# Altium PCB RedHatErrector PCB v1.0.0.0.PcbDoc
Units mil, origin at the board's own origin, x right, y up, seen from the top; angles counter-clockwise.
Board outline 6000 x 4000 mil, 2 copper layers (Top Layer, Bottom Layer); 40 components, 52 nets, 232 pads, 0 vias.
Unrouted connection lines stored in the file: 151.
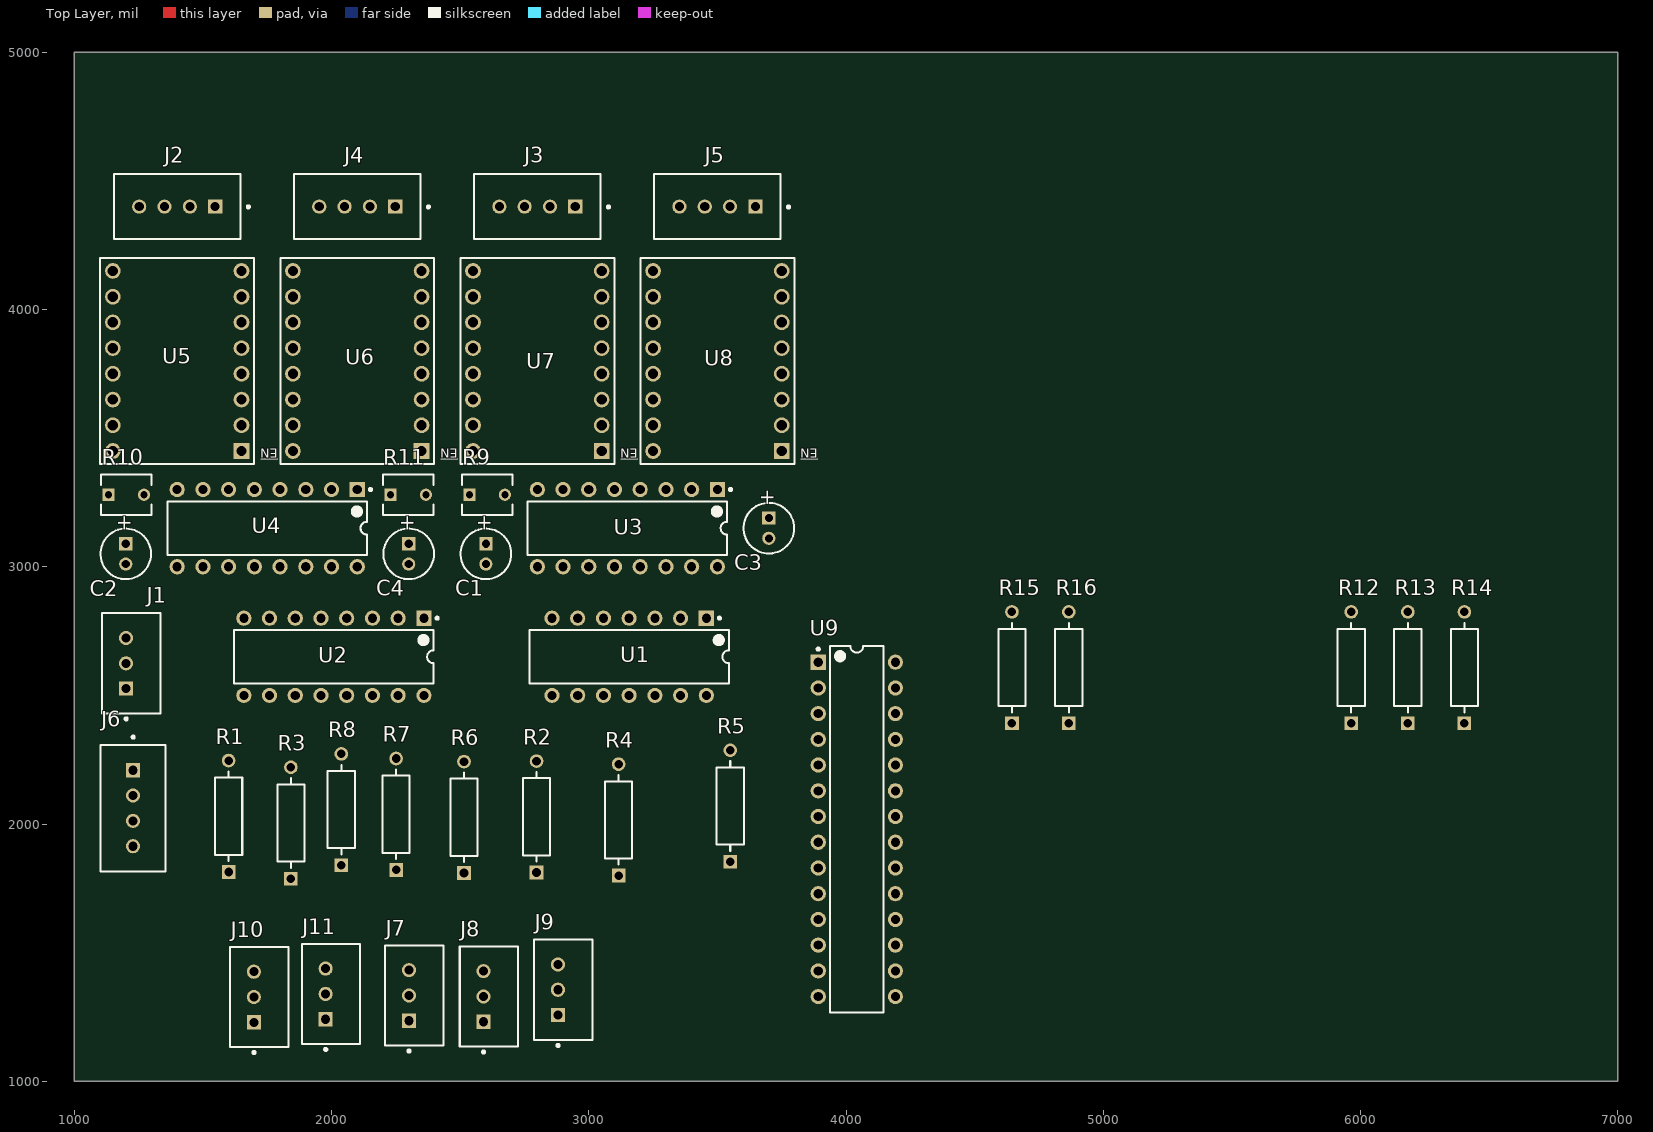
[diagram p0: Top Layer view]
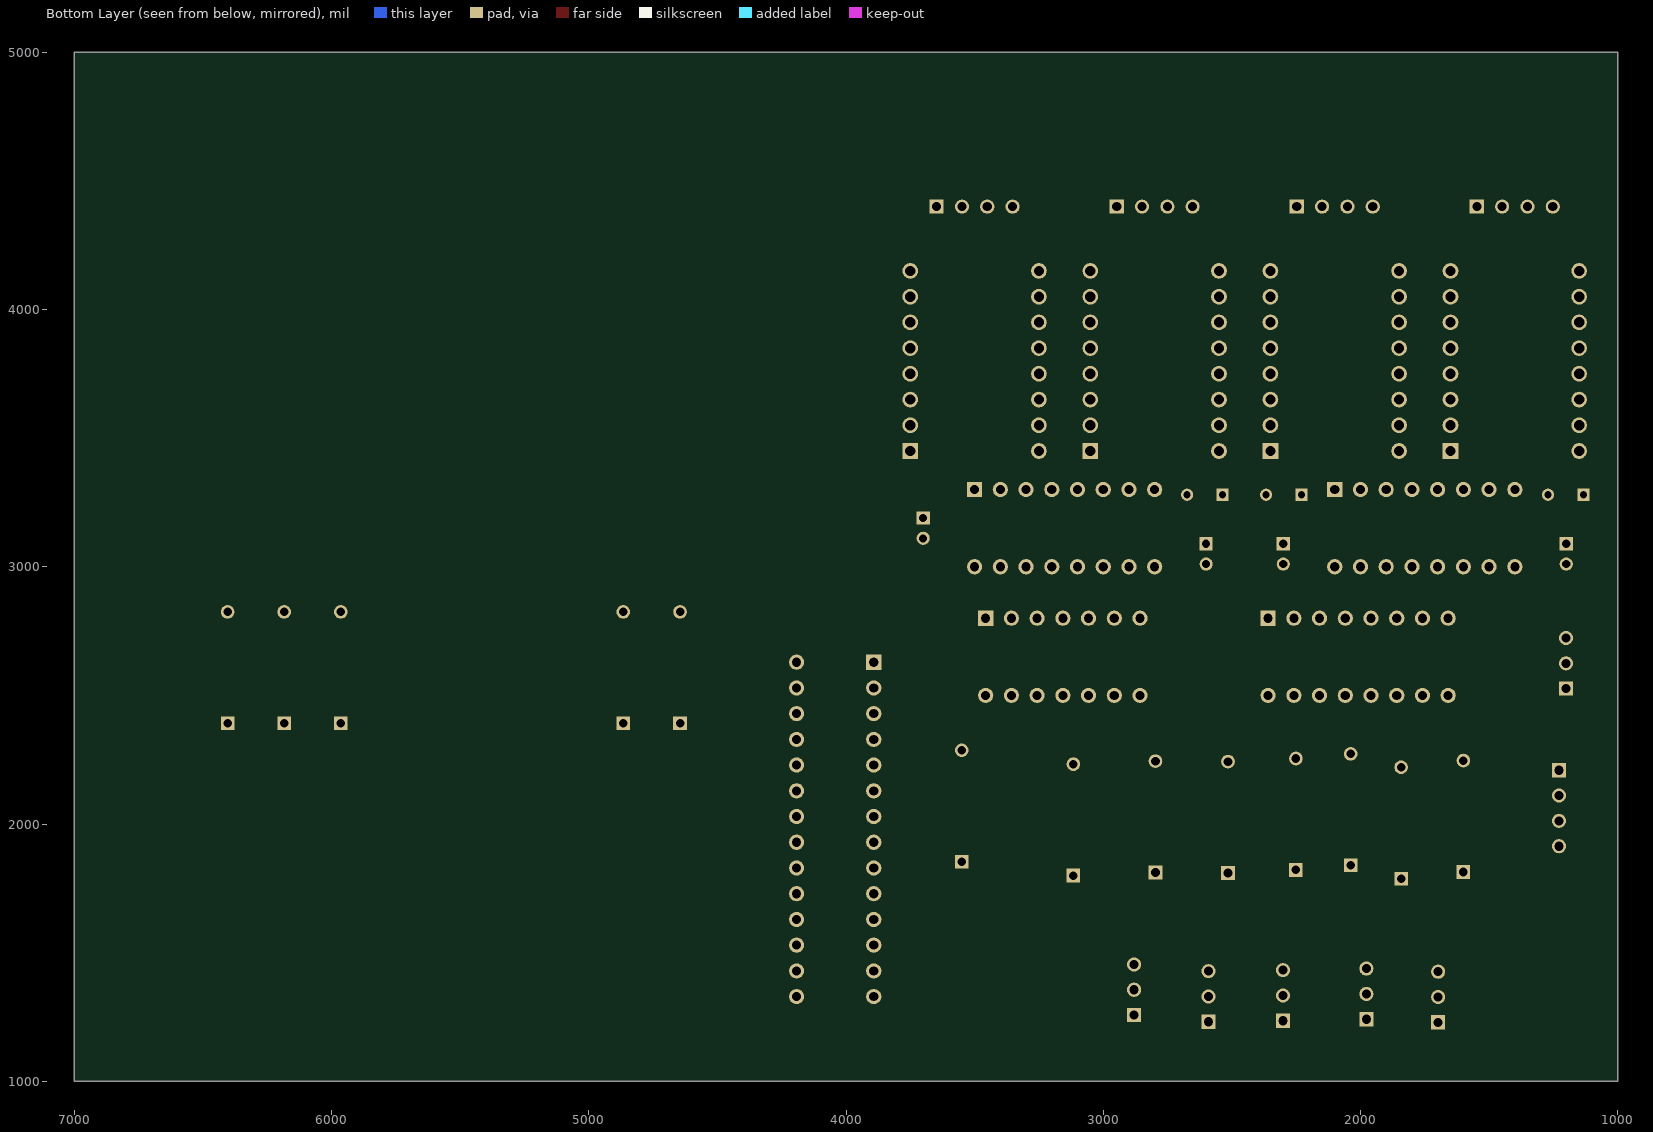
[diagram p1: Bottom Layer view, seen from below]

## Layer stack, top to bottom
Top Solder: solder mask 0.4, Solder Resist, Dk 3.5
Top Layer: signal copper 1.4
Dielectric 1: dielectric 12.6, FR-4, Dk 4.8
Bottom Layer: signal copper 1.4
Bottom Solder: solder mask 0.4, Solder Resist, Dk 3.5

## Board outline
1000,1000 7000,1000 7000,5000 1000,5000

## Design rules (kind name [scope] priority, off if disabled: settings)
Clearance [All] p1: gap=10 ignorepadtopadclearanceinfootprint=FALSE except(0: Arc-Hole Track-Hole SMDPad-Hole THPad-Hole Via-Hole Fill-Hole Poly-Hole Region-Hole Text-Hole)
PolygonConnect [All] p1: connectstyle=Relief reliefconductorwidth=10 reliefentries=4 polygonreliefangle="90 Angle" airgapwidth=10
RoutingVias [All] p1: holewidth=28 width=50 viastyle="Through Hole" minholewidth=28 minwidth=50 maxholewidth=28 maxwidth=50
SolderMaskExpansion [All] p1: expansion=4 istentingtop=FALSE
Width [All] p1: maxlimit=10 minlimit=10 preferedwidth=10
30 further rules are at their usual default settings.

## Components (designator, comment, footprint, x,y, rotation, side; value= is the part's Value field where it differs from the comment)
C1 "ECA1HM220" CAPPR55-200-1100X500X1200 2600,3050 r270 top value=22µF
C2 "ECA1HM220" CAPPR55-200-1100X500X1200 1200,3050 r270 top value=22µF
C3 "ECA1HM220" CAPPR55-200-1100X500X1200 3700,3150 r270 top value=22µF
C4 "ECA1HM220" CAPPR55-200-1100X500X1200 2300,3050 r270 top value=22µF
J1 "JST3 HR Acct" FP-B3B-XH-A_LF_SN-MFG 1221.67,2624.57 r90 top
J2 "B04B-XASK-1(LF)(SN)" FP-B04B-XASK-1_LF_SN-MFG 1400,4400 r0 top
J3 "B04B-XASK-1(LF)(SN)" FP-B04B-XASK-1_LF_SN-MFG 2800,4400 r0 top
J4 "B04B-XASK-1(LF)(SN)" FP-B04B-XASK-1_LF_SN-MFG 2100,4400 r0 top
J5 "B04B-XASK-1(LF)(SN)" FP-B04B-XASK-1_LF_SN-MFG 3500,4400 r0 top
J6 "B04B-XASK-1(LF)(SN)" FP-B04B-XASK-1_LF_SN-MFG 1228,2061.36 r90 top
J7 "JST3 HR Acct" FP-B3B-XH-A_LF_SN-MFG 2321.67,1333.57 r90 top
J8 "JST3 HR Acct" FP-B3B-XH-A_LF_SN-MFG 2611.67,1329.57 r90 top
J9 "JST3 HR Acct" FP-B3B-XH-A_LF_SN-MFG 2900.67,1355.57 r90 top
J10 "JST3 HR Acct" FP-B3B-XH-A_LF_SN-MFG 1718.67,1327.43 r90 top
J11 "JST3 HR Acct" FP-B3B-XH-A_LF_SN-MFG 1997.67,1339.43 r90 top
R1 "10K" FP-RNC55-MFG 1600,2030 r90 top value=10kΩ
R2 "10K" FP-RNC55-MFG 2797,2028 r90 top value=10kΩ
R3 "10K" FP-RNC55-MFG 1842,2004 r90 top value=10kΩ
R4 "10K" FP-RNC55-MFG 3116,2016 r90 top value=10kΩ
R5 "10K" FP-RNC55-MFG 3550,2070 r90 top value=10kΩ
R6 "10K" FP-RNC55-MFG 2515,2026 r90 top value=10kΩ
R7 "10K" FP-RNC55-MFG 2251,2038 r90 top value=10kΩ
R8 "10K" FP-RNC55-MFG 2038,2056 r90 top value=10kΩ
R9 "103" FP-PTFL04_2N34-MFG 2605,3280 r0 top
R10 "103" FP-PTFL04_2N34-MFG 1202,3280 r0 top
R11 "103" FP-PTFL04_2N34-MFG 2298,3280 r0 top
R12 "2.2K" FP-RNC55-MFG 5964,2608 r90 top value=10kΩ
R13 "2.2K" FP-RNC55-MFG 6184,2608 r90 top value=10kΩ
R14 "2.2K" FP-RNC55-MFG 6404,2608 r90 top value=10kΩ
R15 "2.2K" FP-RNC55-MFG 4645,2608 r90 top value=10kΩ
R16 "2.2K" FP-RNC55-MFG 4866,2608 r90 top value=10kΩ
U1 "SN74LS90N" N0014A 3157,2650 r270 top
U2 "CD4051BE" N0016A 2009,2650 r270 top
U3 "SN74LS595N" N0016A 3150,3150 r270 top
U4 "SN74LS595N" N0016A 1750,3150 r270 top
U5 "A4988 Motor Driver" "Polo-A4988 Motor Driver_V" 1400,3800 r180 top
U6 "A4988 Motor Driver" "Polo-A4988 Motor Driver_V" 2100,3800 r180 top
U7 "A4988 Motor Driver" "Polo-A4988 Motor Driver_V" 2800,3800 r180 top
U8 "A4988 Motor Driver" "Polo-A4988 Motor Driver_V" 3500,3800 r180 top
U9 "TLC5940NT" NT0028A 4042,1979 r0 top

## Footprints (in the part's own frame and the unit in brackets; to place one, negate y for a bottom-side part, rotate by r counter-clockwise, add the part's x,y. Pads: shape width x height; smd on the part's side, far side on the other; paste and mask are expansions set on the pad)
CAPPR55-200-1100X500X1200 [mm] "THD, 2-Leads, Dia 5mm, Pin Spacing 2mm"
  rect 1.3x1.3 hole 0.8: 1(-1,0)
  round 1.3 hole 0.8: 2(1,0)
  silkscreen extent -2.5,-2.5 2.5,2.5, body extent -2.5,-2.5 2.45,2.5, height 12
FP-B3B-XH-A_LF_SN-MFG [mm]
  rect 1.4x1.4 hole 0.9 paste-1000 mask+0: 1(-2.5,0.525)
  round 1.4 hole 0.9 paste-1000 mask+0: 2(0,0.525) 3(2.5,0.525)
  silkscreen extent -5.61,-2.88 4.95,2.88, body extent -5.05,-2.98 5.05,2.98, height 0.25
FP-B04B-XASK-1_LF_SN-MFG [mm]
  rect 1.4x1.4 hole 0.9 paste-1000 mask+0: 1(3.75,0)
  round 1.4 hole 0.9 paste-1000 mask+0: 2(1.25,0) 3(-1.25,0) 4(-3.75,0)
  silkscreen extent -6.25,-3.2 7.15,3.2, body extent -6.35,-3.3 6.35,3.3, height 0.25
FP-PTFL04_2N34-MFG [mm]
  rect 1.2x1.2 hole 0.7 paste-1000 mask+0: 1(-1.75,0)
  round 1.2 hole 0.7 paste-1000 mask+0: 2(1.75,0)
  silkscreen extent -2.5,-2 2.5,2, body extent -2.6,-2.1 2.6,2.1, height 0.25
FP-RNC55-MFG [mm]
  rect 1.35x1.35 hole 0.85 paste-1000 mask+0: 1(-5.5,0)
  round 1.35 hole 0.85 paste-1000 mask+0: 2(5.5,0)
  silkscreen extent -4.43,-1.35 4.43,1.35, body extent -6.27,-1.45 6.27,1.45, height 0.25
N0014A [mm] "DIP, 14-Leads, Body 19.7x6.6mm, Pitch 2.54mm"
  rect 1.5x1.5 hole 0.9: 1(-3.81,7.62)
  round 1.5 hole 0.9: 2(-3.81,5.08) 3(-3.81,2.54) 4(-3.81,0) 5(-3.81,-2.54) 6(-3.81,-5.08) 7(-3.81,-7.62) 8(3.81,-7.62) 9(3.81,-5.08) 10(3.81,-2.54) 11(3.81,0) 12(3.81,2.54) 13(3.81,5.08) 14(3.81,7.62)
  silkscreen extent -3.93,-9.85 2.65,9.85, body extent -3.95,-9.85 3.95,9.85, height 5.08
N0016A [mm] "DIP, 16-Leads, Body 19.7x6.6mm, Pitch 2.54mm"
  rect 1.5x1.5 hole 0.9: 1(-3.81,8.89)
  round 1.5 hole 0.9: 2(-3.81,6.35) 3(-3.81,3.81) 4(-3.81,1.27) 5(-3.81,-1.27) 6(-3.81,-3.81) 7(-3.81,-6.35) 8(-3.81,-8.89) 9(3.81,-8.89) 10(3.81,-6.35) 11(3.81,-3.81) 12(3.81,-1.27) 13(3.81,1.27) 14(3.81,3.81) 15(3.81,6.35) 16(3.81,8.89)
  silkscreen extent -3.93,-9.85 2.65,10.32, body extent -3.95,-9.85 3.95,9.85, height 5.08
NT0028A [mm] "DIP, 28-Leads, Body 35.69x6.73mm, Pitch 2.54mm, Row Spacing 7.62mm"
  rect 1.5x1.5 hole 0.9: 1(-3.81,16.51)
  round 1.5 hole 0.9: 2(-3.81,13.97) 3(-3.81,11.43) 4(-3.81,8.89) 5(-3.81,6.35) 6(-3.81,3.81) 7(-3.81,1.27) 8(-3.81,-1.27) 9(-3.81,-3.81) 10(-3.81,-6.35) 11(-3.81,-8.89) 12(-3.81,-11.43) 13(-3.81,-13.97) 14(-3.81,-16.51) 15(3.81,-16.51) 16(3.81,-13.97) 17(3.81,-11.43) 18(3.81,-8.89) 19(3.81,-6.35) 20(3.81,-3.81) 21(3.81,-1.27) 22(3.81,1.27) 23(3.81,3.81) 24(3.81,6.35) 25(3.81,8.89) 26(3.81,11.43) 27(3.81,13.97) 28(3.81,16.51)
  silkscreen extent -3.93,-18.1 2.65,18.1, body extent -3.95,-18.1 3.95,18.1, height 5.08
"Polo-A4988 Motor Driver_V" [mm] "THD, 16-Leads, Body 20.3x15.2mm, Pitch 2.54mm"
  rect 1.55x1.55 hole 1.02: 1(-6.35,8.89)
  round 1.55 hole 1.02: 2(-6.35,6.35) 3(-6.35,3.81) 4(-6.35,1.27) 5(-6.35,-1.27) 6(-6.35,-3.81) 7(-6.35,-6.35) 8(-6.35,-8.89) 9(6.35,-8.89) 10(6.35,-6.35) 11(6.35,-3.81) 12(6.35,-1.27) 13(6.35,1.27) 14(6.35,3.81) 15(6.35,6.35) 16(6.35,8.89)
  silkscreen extent -9.91,-10.15 7.6,10.15, body extent -7.62,-10.16 7.62,10.16, height 5.04

## Part data
C1 C2 C3 C4: library part CMP-001-00027-7, "Aluminum Electrolytic Capacitor, 22 uF, +/- 20%, 50 V, -40 to 85 degC, 2-Pin THD, RoHS, Bulk", Capacitor Type=Electrolytic, Case/Package=Radial, Manufacturer=Panasonic, Max Operating Temperature=85°C, Min Operating Temperature=-40°C, Package Description="2-Pin Radial Lead, Dia 5 mm, Height 12 mm", Package Quantity=200, Package Reference=CAPPR55-200-1100X500X1200, Ripple Current=100mA, Tolerance=20%, Voltage Rating=50V, Datasheet URL=https://industrial.panasonic.com/cdbs/www-data/pdf/RDF0000/ABA0000C1218.pdf, Datasheet Version="Rev. 05, 10/2016", Diameter=5mm, Lead Pitch=2mm, Manufacturer URL=http://www.panasonic.com/, Mounting Technology=TH, Packaging=Bulk, Pins=2, Ripple Current (AC)=100mA, RoHS Compliant=True
J1 J7 J8 J9 J10 J11: library part CMP-17439-000014-2, "CONN HEADER VERT 3POS 2.5MM", Color=Natural, Contact Resistance=20mR, Current Rating=3A, Flammability Rating="UL94 V-0", Housing Color=White, Insulation Resistance=1GR, Max Operating Temperature=85°C, Max Voltage Rating (AC)=250V, Min Operating Temperature=-25°C, Connector Type=Header, Contact Finish - Mating=TIN, Contact Material=Brass, Contact Plating=Tin, Contact Shape=Square, Contact Type="Male Pin", Depth=5.75mm, Fastening Type=Detent, Gender=Male, Housing Material=Polyamide, Insulation Color=Natural, Insulation Material=Nylon, Lead Free="Lead Free", Lead Pitch=2.5mm, Length=9.9mm, Max Current Rating=3A, Max Voltage Rating (DC)=250V, Mount="Through Hole", Number of Contacts=3, Number of Positions=3, Number of Rows=1, Orientation=Straight, Packaging=Bulk, Pitch=2.5mm, REACH SVHC="No SVHC", Series=XH, Termination=Solder, Voltage Rating=250V, Voltage Rating (AC)=250V, Wire/Cable Gauge=22AWG
J2 J3 J4 J5 J6: library part CMP-17439-000018-1, "CONN HEADER VERT 4POS 2.5MM", Current Rating=3A, Manufacturer=JST, Temperature="-25°C to +85°C", Temperature Range High=+85°C, Temperature Range Low=-25°C, Voltage Rating=250V, Automotive=No, Category=Conn, ComponentLink2Description=Datasheet, ComponentLink2URL=http://www.jst-mfg.com/product/pdf/eng/eXA1.pdf, Conn Gender=Male, Conn Orientation=Straight, Contact Material=Tin,Copper, Device Class L1=Connectors, Device Class L2="Headers and Wire Housings", Device Class L3=unset, Digikey Description="CONN HEADER VERT 4POS 2.5MM", Height=8.8mm, Lead Free=Yes, Manufacturer Part Number=B04B-XASK-1(LF)(SN), Number of Contacts=4, Number of Rows=1, Octopart=https://octopart.com/b04b-xask-1%28lf%29%28sn%29-jst-3990149, Package=B04B-XASK-1(LF)(SN), Pitch=2.5mm, RoHS=TRUE
R1 R2 R3 R4 R5 R6 R7 R8 R13 R14 R15 R16: library part CMP-02408-000004-1, "RES 10K OHM 1/8W 1% AXIAL", Manufacturer=Vishay, Manufacturer Part Number=RNC55H1002FSB14, Package=RNC55, Power Rating=0.125W, Resistance=10kΩ, Temperature="-65°C to +175°C", Temperature Coefficient=50ppm/°C, Temperature Range High=+175°C, Temperature Range Low=-65°C, Tolerance=1%, Voltage Rating=200V, Automotive=No, Category=Res, ComponentLink2Description=Datasheet, ComponentLink2URL=https://www.vishay.com/docs/31025/erc.pdf, Composition="Metal Film", Device Class L1="Passive Components", Device Class L2=Resistors, Device Class L3="Through-Hole Resistors", Digikey Description="RES 10K OHM 1/8W 1% AXIAL", Failure Rate=0.001%, Height=2.69mm, Ipc Land Pattern Name=RESAD1100W85L762D269, Lead Free=No, Military Standard=true, Octopart=https://octopart.com/rnc55h1002fs-vishay-40848808, RoHS=FALSE, Series=RNC
R9 R10 R11: library part CMP-06022-000451-1, "THERMISTOR PTC 100 OHM DISC", Case/Package=Radial, Current Rating=100mA, Max Operating Temperature=130°C, Max Supply Voltage=16V, Min Operating Temperature=-10°C, Package Quantity=400, Resistance=100R, Depth=4mm, Lead Length=25mm, Mount="Through Hole", Number of Pins=2, Packaging=Bulk, REACH SVHC="No SVHC", Termination=Radial, Voltage=16V
R12: library part CMP-02408-000004-1, "RES 5K OHM 1/8W 1% AXIAL", Manufacturer=Vishay, Manufacturer Part Number=RNC55H1002FSB14, Package=RNC55, Power Rating=0.125W, Resistance=10kΩ, Temperature="-65°C to +175°C", Temperature Coefficient=50ppm/°C, Temperature Range High=+175°C, Temperature Range Low=-65°C, Tolerance=1%, Voltage Rating=200V, Automotive=No, Category=Res, ComponentLink2Description=Datasheet, ComponentLink2URL=https://www.vishay.com/docs/31025/erc.pdf, Composition="Metal Film", Device Class L1="Passive Components", Device Class L2=Resistors, Device Class L3="Through-Hole Resistors", Digikey Description="RES 10K OHM 1/8W 1% AXIAL", Failure Rate=0.001%, Height=2.69mm, Ipc Land Pattern Name=RESAD1100W85L762D269, Lead Free=No, Military Standard=true, Octopart=https://octopart.com/rnc55h1002fs-vishay-40848808, RoHS=FALSE, Series=RNC
U1: library part CMP-1623-00486-2, "Decade Counter, N0014A, TUBE", F @ Nom Voltage(Max)(Mhz)=35, Generic Part Number=SN74LS90, ICC @ Nom Voltage(Max)(mA)=15, Manufacturer="Texas Instruments", Operating Temperature Range(C)="0 to 70", Rating=Catalog, tpd @ Nom Voltage(Max)(ns)=50, Voltage(Nom)(V)=5, Bits(#)=4, Code_JEDEC=MS-001, DatasheetVersion=SDLS940A, Function=Counter, Input Type=TTL, Inputs=1, Output Drive (IOL/IOH)(Max)(mA)=8/-0.4, Output Type=CMOS, PackageReference=N0014A, Schmitt Trigger=No, Technology Family=LS, Type=Decade, VCC(Max)(V)=5.25, VCC(Min)(V)=4.75
U2: library part CMP-1575-00059-4, "CMOS Single 8-Channel Analog Multiplexer/Demultiplexer with Logic-Level Conversion, N0016A, TUBE", Generic Part Number=CD4051B, Manufacturer="Texas Instruments", Operating Temperature Range(C)="-55 to 125", Rating=Military, Bandwidth(Max)(MHz)=20, Code_JEDEC=MS-001, Configuration="1 X 1：8 MUX", Crosstalk=Yes, DatasheetVersion=SCHS047G, ICC(Typ)(mA)=0.00008, Output Drive (IOL/IOH)(Max)(mA)=1, Output Type=CMOS, PackageReference=N0016A, PackageVersion=http://www.ti.com/lit/ml/mpdi002c/mpdi002c.pdf, Ron(Max)(Ohms)=240, Ron(Typ)(Ohms)=125, VCC(Max)(V)=18, VCC(Min)(V)=5
U3 U4: library part CMP-0780-00142-3, "Serial-in shift registers with output registers, N0016A, TUBE", F @ Nom Voltage(Max)(Mhz)=35, Generic Part Number=SN74LS595, ICC @ Nom Voltage(Max)(mA)=65, Manufacturer="Texas Instruments", Operating Temperature Range(C)="0 to 70", Rating=Catalog, tpd @ Nom Voltage(Max)(ns)=25, Voltage(Nom)(V)=5, 3-State Output=Yes, Bits=8, Code_JEDEC=MS-001, DatasheetVersion=SDLS006, Input Type=TTL, Output Drive (IOL/IOH)(Max)(mA)=24/-2.6, Output Type=TTL, PackageReference=N0016A, PackageVersion=http://www.ti.com/lit/ml/mpdi002c/mpdi002c.pdf, Technology Family=LS, VCC(Max)(V)=5.25, VCC(Min)(V)=4.75
U5 U6 U7 U8: library part CMP-00024-00002-2, "Stepper Motor Driver Carrier, 3 to 5.5 V, 2 A, 16-Pin THD", Case/Package=A4988MotorDriver, Manufacturer="Pololu Robotics & Electronics", Package Description="16-Pin Through Hole Device, Body 20.3 x 15.2 mm, Pitch 2.54 mm", Datasheet URL=https://www.pololu.com/file/0J1082/a4988-stepper-motor-driver-carrier-dimension-diagram.pdf, Datasheet Version=Dec-15, Mounting Technology=TH, Package Reference="A4988 Motor Driver", RoHS Compliant=Unknown
U9: library part CMP-0388-00347-2, "16-Channel LED Driver with EEprom DOT Correction & Grayscale PWM Control, 3 to 5.5 V, -40 to 85 degC, 28-pin DIP (NT28), Green (RoHS & no Sb/Br)", Manufacturer="Texas Instruments", Rating=Catalog, ComponentLink1Description="Manufacturer URL", ComponentLink1URL=http://www.ti.com/, ComponentLink2Description=Datasheet, ComponentLink2URL=http://www.ti.com/general/docs/lit/getliterature.tsp?genericPartNumber=TLC5940&fileType=pdf, ComponentLink3Description="Package Specification", ComponentLink3URL=http://www.ti.com/lit/ml/mpdi004a/mpdi004a.pdf, DatasheetVersion=SLVS515C, Eco-Plan="Green (RoHS & no Sb/Br)", Mounting Technology="Through Hole", PackageDescription="28-Lead, Plastic In-Line, Body Size 35.69 x 6.73 mm, Pitch 2.54 mm", PackageReference=NT0028A, PackageVersion=4040050/C, PartNumber=TLC5940NT, SubFamily="LED Driver", Vin(Max)(V)=5.5, Vin(Min)(V)=3

## Nets (pads, with @x,y where several pads share a name; then routed paths per layer and width w, separated by ;. In a path a pad name is that pad's centre, name@x,y a point inside that pad or via, vN(x,y) a via of type N, cw(c..) or ccw(c..) an arc to the next point about the centre after c; other vN are vias at no path point)
+5: J7.2 J8.2 J9.2 J10.2 J11.2 R12.2 R13.2 R14.2 R15.2 R16.2 U1.5 U2.16 U3.10 U3.16 U4.10 U4.16 U5.5 U5.10 U6.5 U6.10 U7.5 U7.10 U8.5 U8.10 U9.21
+12: C1.1 C2.1 C3.1 C4.1 U5.16 U6.16 U7.16 U8.16
GND: C1.2 C2.2 C3.2 C4.2 J1.1 J6.1 J7.1 J8.1 J9.1 J10.1 J11.1 R1.1 R2.1 R3.1 R4.1 R5.1 R5.2 R6.1 R7.1 R8.1 R9.1 R10.1 R11.1 U1.2 U1.3 U1.6 U1.7 U1.10 U2.6 U2.7 U2.8 U2.12 U3.8 U3.13 U4.8 U4.13 U5.1 U5.2 U5.3 U5.4 U5.9 U5.15 U6.1 U6.2 U6.3 U6.4 U6.9 U6.15 U7.1 U7.2 U7.3 U7.4 U7.9 U7.15 U8.1 U8.2 U8.3 U8.4 U8.9 U8.15 U9.22
NetJ1_2: J1.2 R1.2 U2.4
NetJ2_1: J2.1 U5.14
NetJ2_2: J2.2 U5.13
NetJ2_3: J2.3 U5.12
NetJ2_4: J2.4 U5.11
NetJ3_1: J3.1 U7.14
NetJ3_2: J3.2 U7.13
NetJ3_3: J3.3 U7.12
NetJ3_4: J3.4 U7.11
NetJ4_1: J4.1 U6.14
NetJ4_2: J4.2 U6.13
NetJ4_3: J4.3 U6.12
NetJ4_4: J4.4 U6.11
NetJ5_1: J5.1 U8.14
NetJ5_2: J5.2 U8.13
NetJ5_3: J5.3 U8.12
NetJ5_4: J5.4 U8.11
NetJ6_2: J6.2 R6.2 U2.15
NetJ6_3: J6.3 R7.2 U2.14
NetJ6_4: J6.4 R8.2 U2.13
NetJ7_3: J7.3 R12.1 U9.28
NetJ8_3: J8.3 R13.1 U9.1
NetJ9_3: J9.3 R14.1 U9.2
NetJ10_3: J10.3 R15.1 U9.3
NetJ11_3: J11.3 R16.1 U9.4
NetR2_2: R2.2 R9.2 U2.2
NetR3_2: R3.2 R10.2 U2.5
NetR4_2: R4.2 R11.2 U2.1
NetU1_1: U1.1 U1.11
NetU1_8: U1.8 U2.9
NetU1_9: U1.9 U2.10
NetU1_12: U1.12 U2.11
NetU1_14: U1.14 U3.11 U4.11 U9.25
NetU2_3: U2.3
NetU3_1: U3.1 U5.7
NetU3_2: U3.2 U6.8
NetU3_3: U3.3 U6.7
NetU3_4: U3.4 U7.8
NetU3_5: U3.5 U7.7
NetU3_6: U3.6 U8.8
NetU3_7: U3.7 U8.7
NetU3_12: U3.12
NetU3_14: U3.14 U4.14
NetU3_15: U3.15 U5.8
NetU4_1: U4.1 U6.6
NetU4_2: U4.2 U7.6
NetU4_3: U4.3 U8.6
NetU4_12: U4.12
NetU4_15: U4.15 U5.6
pads on no net: J1.3 U1.4 U1.13 U3.9 U4.4 U4.5 U4.6 U4.7 U4.9 U9.5 U9.6 U9.7 U9.8 U9.9 U9.10 U9.11 U9.12 U9.13 U9.14 U9.15 U9.16 U9.17 U9.18 U9.19 U9.20 U9.23 U9.24 U9.26 U9.27

## Text inside footprints (layer, text, board x,y; h text height)
C1: Top Overlay "+" at 2570.98,3203.86 h59.06 r270
C2: Top Overlay "+" at 1170.98,3203.86 h59.06 r270
C3: Top Overlay "+" at 3670.98,3303.86 h59.06 r270
C4: Top Overlay "+" at 2270.98,3203.86 h59.06 r270
U5: Top Overlay "EN" at 1790,3470 h60 r180
U6: Top Overlay "EN" at 2490,3470 h60 r180
U7: Top Overlay "EN" at 3190,3470 h60 r180
U8: Top Overlay "EN" at 3890,3470 h60 r180